# Altium PCB UPCNSL_ABS_EPS_POL_v.2.1.PcbDoc
Units mm, origin at the board's own origin, x right, y up, seen from the top; angles counter-clockwise.
Board outline 100 x 100 mm, 2 copper layers (Top Layer, Bottom Layer); 100 components, 65 nets, 323 pads, 138 vias.
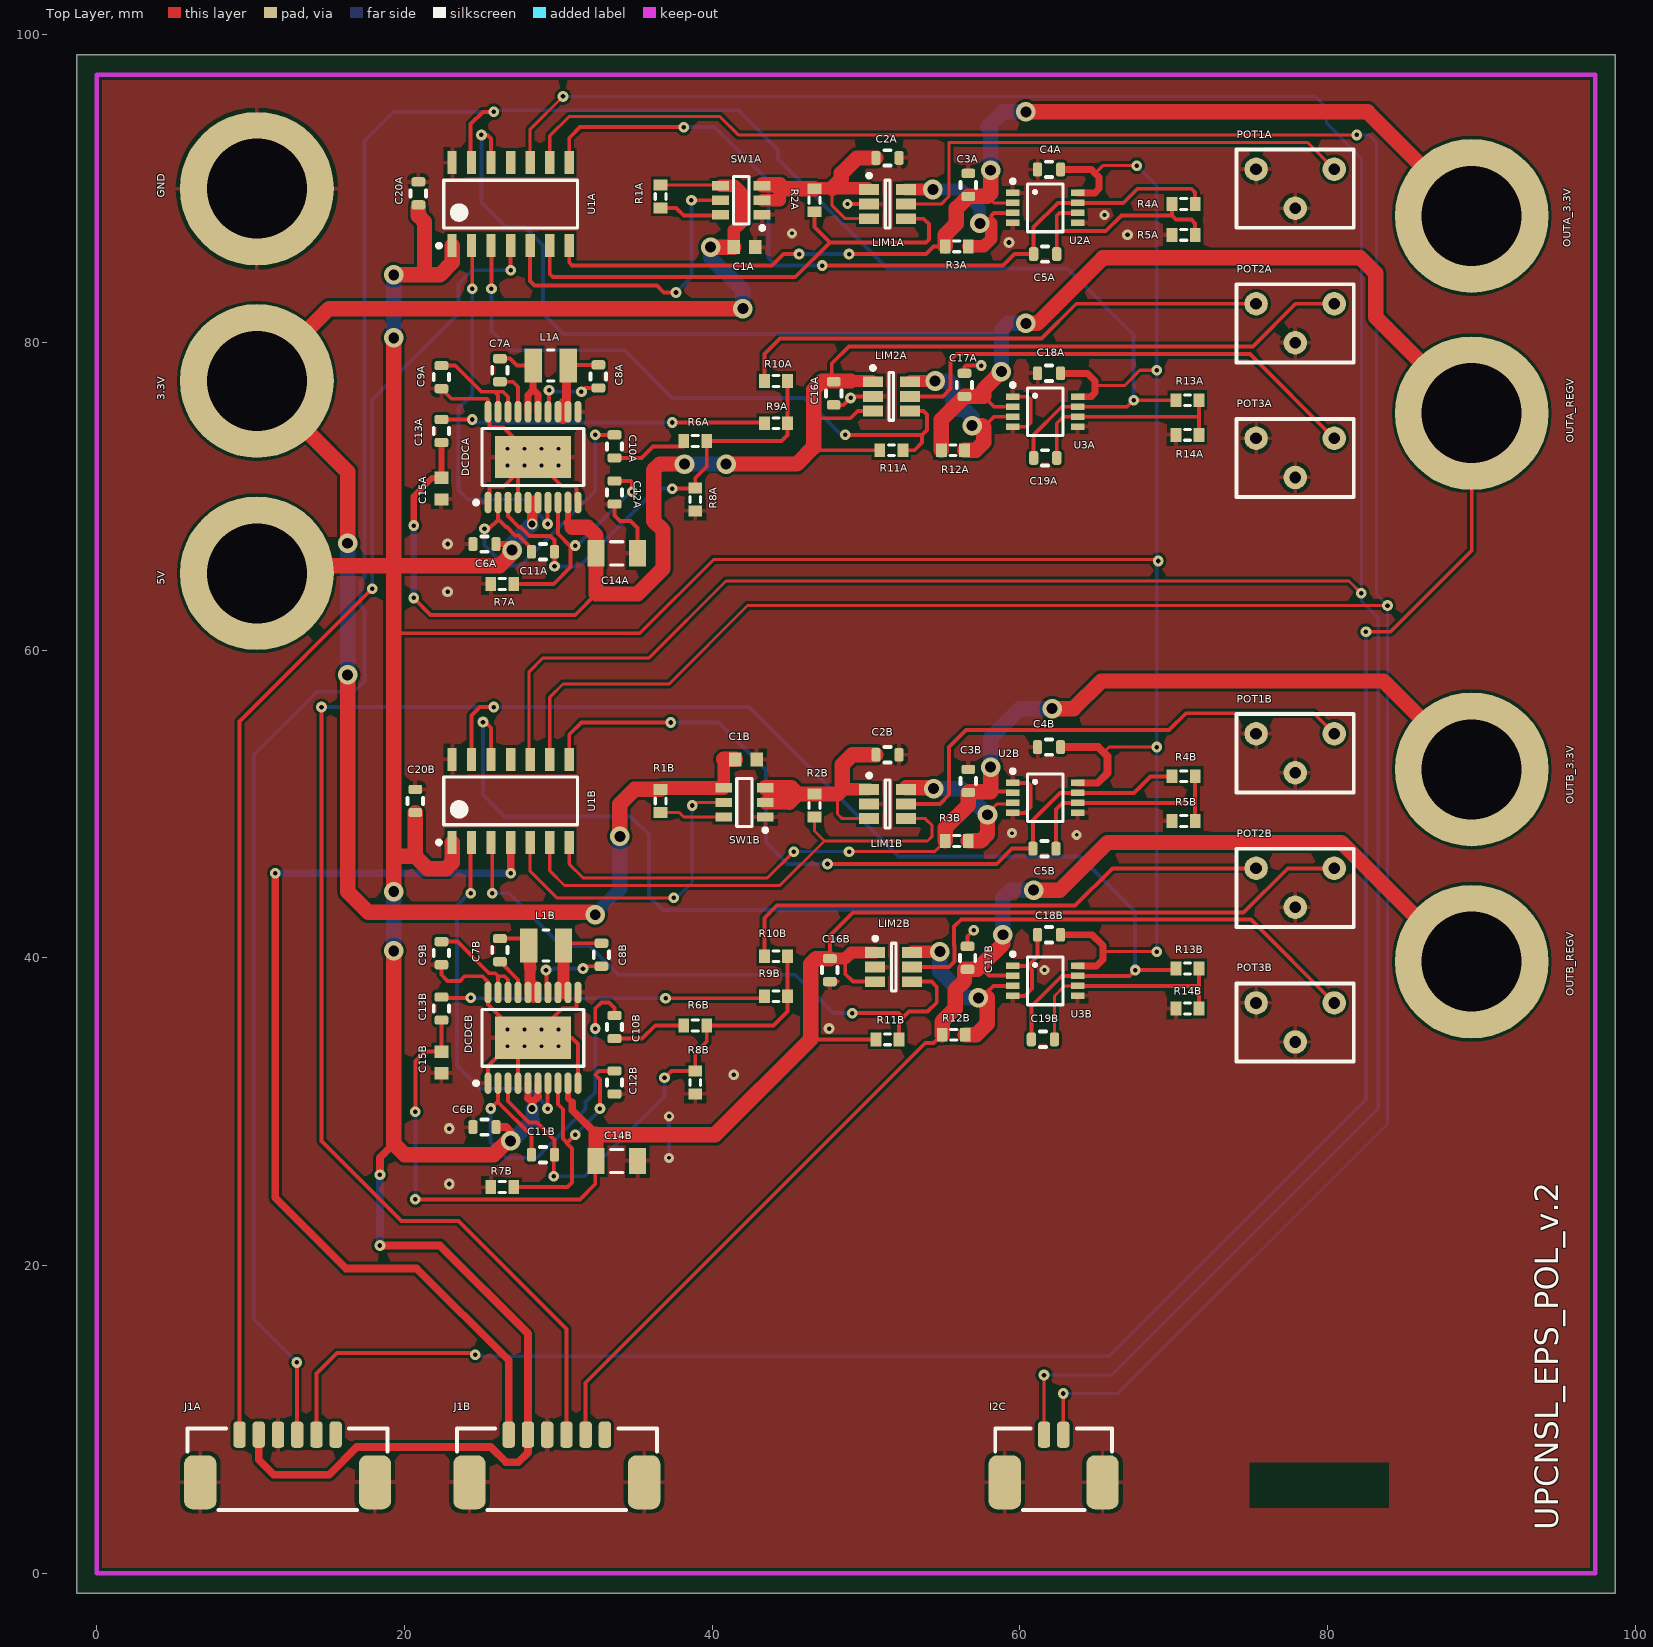
[diagram p0: Top Layer view]
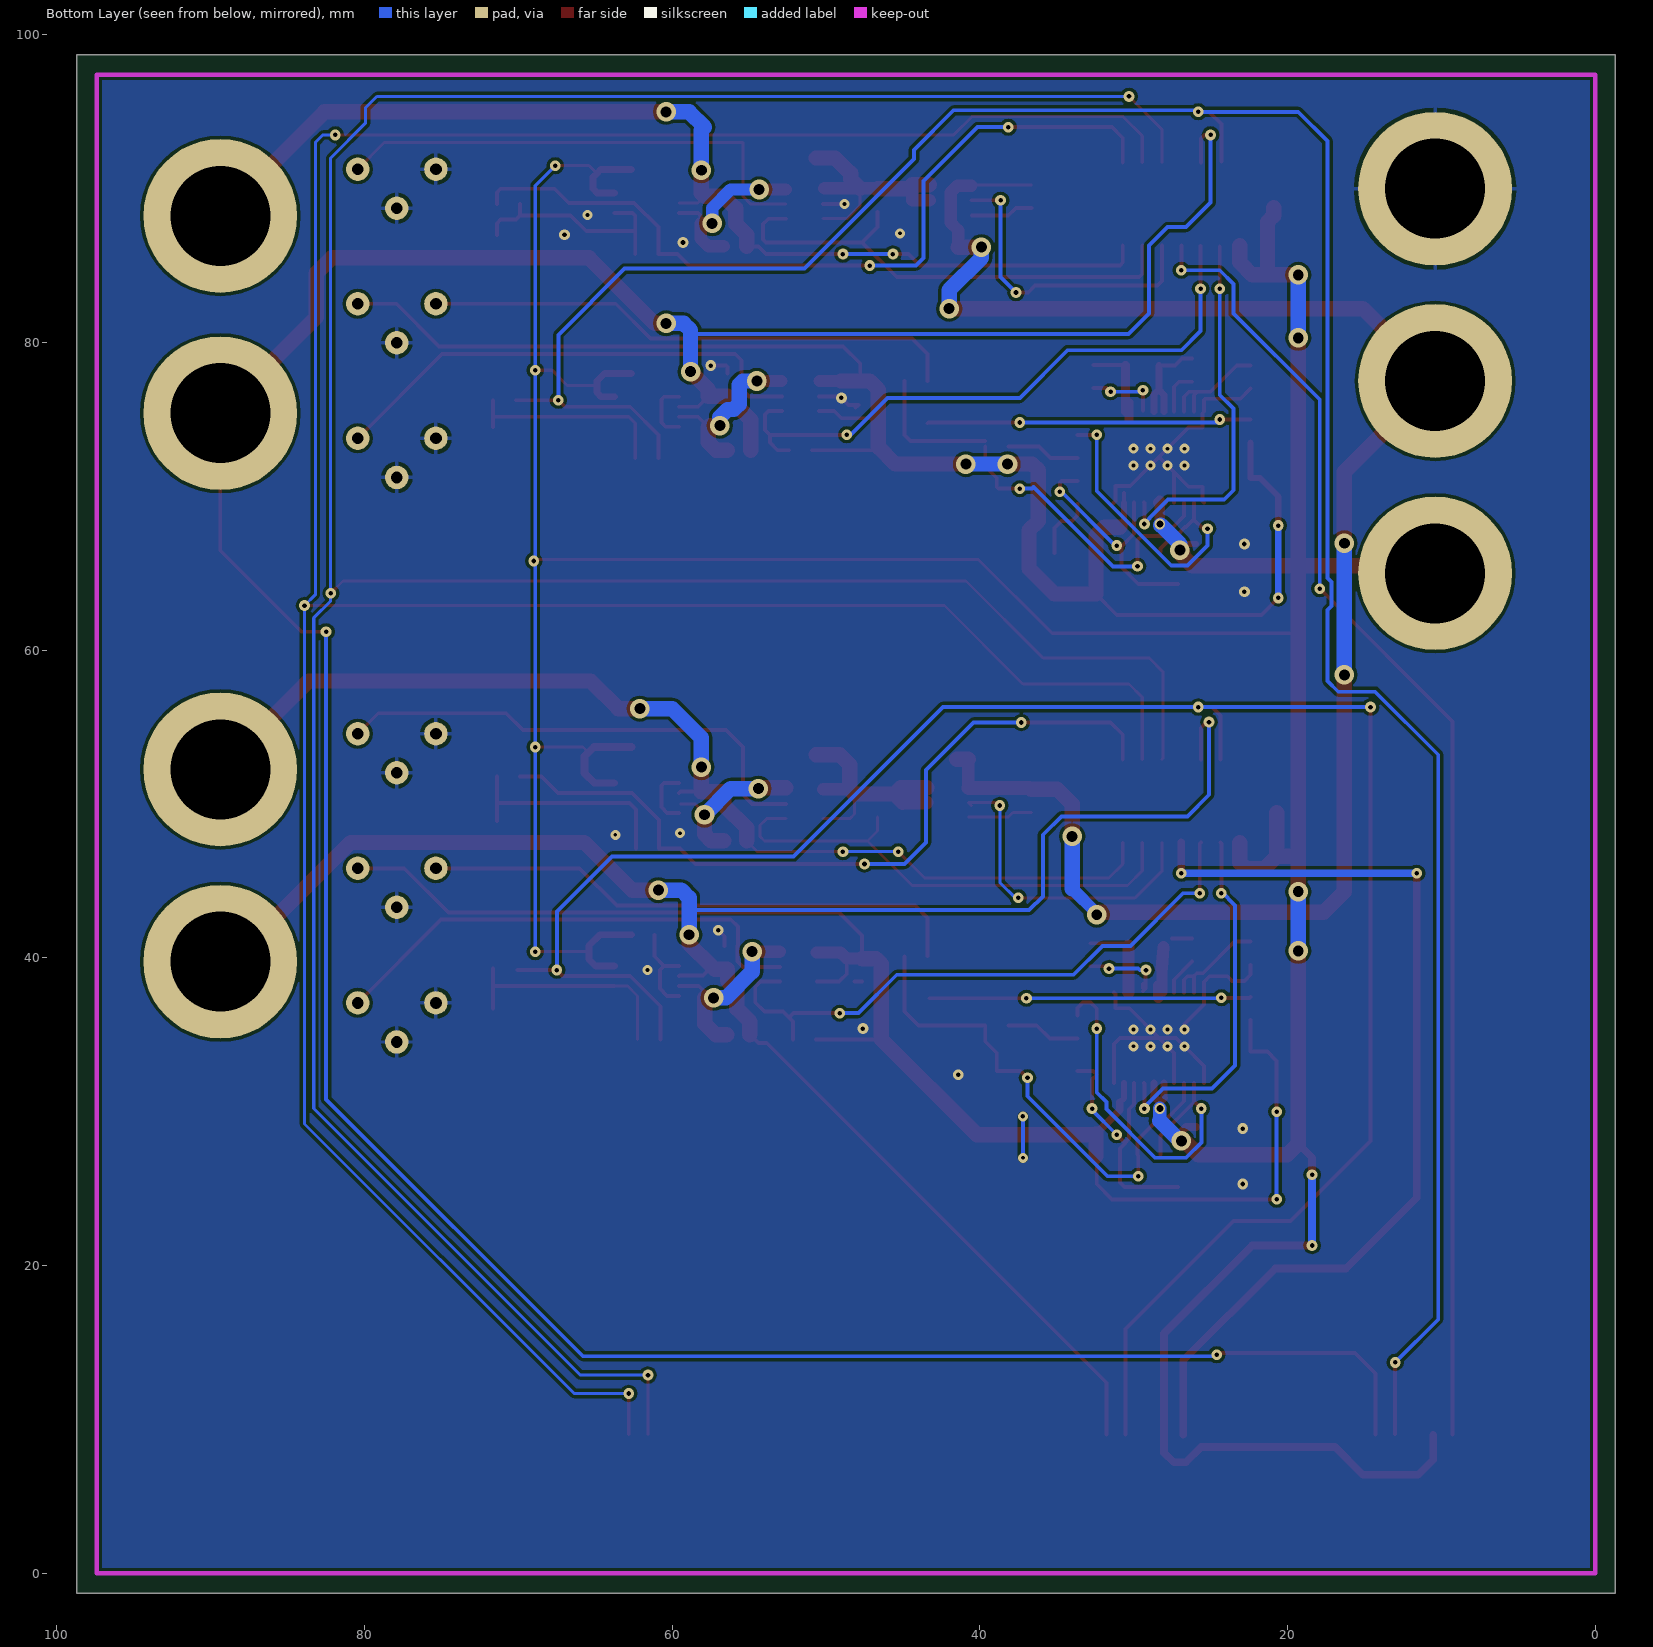
[diagram p1: Bottom Layer view, seen from below]

## Layer stack, top to bottom
Top Solder: solder mask 0.0102, Solder Resist, Dk 3.5
Top Layer: signal copper 0.0356
Dielectric 1: dielectric 0.32, FR-4, Dk 4.8
Bottom Layer: signal copper 0.0356
Bottom Solder: solder mask 0.0102, Solder Resist, Dk 3.5

## Board outline
-1.3,-1.3 98.7,-1.3 98.7,98.7 -1.3,98.7

## Design rules (kind name [scope] priority, off if disabled: settings)
Clearance [All] p1: gap=0.2
HoleSize [All] p1: absolutevalues=TRUE maxlimit=10 minlimit=0.25 maxpercent=80.000 minpercent=20.000
HoleToHoleClearance [All] p1: gap=0.2 allowstackedmicrovias=TRUE
MinimumSolderMaskSliver [All] p1: minsoldermaskwidth=0.1
PolygonConnect VIAGND [IsVia vs InNET('GND')] p1: connectstyle=Direct reliefconductorwidth=0.254 reliefentries=4 polygonreliefangle="90 Angle" airgapwidth=0.254
PolygonConnect PolygonConnect_1 [All] p2: connectstyle=Relief reliefconductorwidth=0.254 reliefentries=4 polygonreliefangle="90 Angle" airgapwidth=0.254
RoutingVias [All] p1: holewidth=0.35 width=0.6 viastyle="Through Hole" minholewidth=0.2 minwidth=0.2 maxholewidth=1 maxwidth=2
SilkToSilkClearance [All] p1: silktosilkclearance=0.2
SilkToSolderMaskClearance [IsPad] p1: minsilkscreentomaskgap=0.075 clearancetoexposedcopper=TRUE
SolderMaskExpansion [All] p1: expansion=0.102
UnpouredPolygon [All] p1: allowunpoured=FALSE
Width [All] p1: maxlimit=1 minlimit=0.2 preferedwidth=0.2
24 further rules are at their usual default settings.

## Components (designator, comment, footprint, x,y, rotation, side; value= is the part's Value field where it differs from the comment)
3.3V "Banana" Banana#1 10.4,77.5 r0 top
5V "Banana" Banana#1 10.4,65 r0 top
C1A "Cap Semi" 1608[0603] 42.1,86.2 r180 top
C1B "Cap Semi" 1608[0603] 42.2,52.9 r180 top
C2A "CAP0603" CAP0603 51.4,92 r0 top
C2B "CAP0603" CAP0603 51.4,53.2 r0 top
C3A "CAP0603" CAP0603 56.65,90.25 r90 top
C3B "CAP0603" CAP0603 56.65,51.5 r90 top
C4A "CAP0603" CAP0603 61.9,91.25 r0 top
C4B "CAP0603" CAP0603 61.9,53.7 r0 top
C5A "CAP0603" CAP0603 61.65,85.75 r0 top
C5B "CAP0603" CAP0603 61.6,47.1 r0 top
C6A "Cap Semi" CAP0603 25.2,66.9 r0 top
C6B "Cap Semi" CAP0603 25.2,29 r0 top
C7A "Cap Semi" CAP0603 26.2,78.2 r270 top
C7B "Cap Semi" CAP0603 26.2,40.5 r270 top
C8A "Cap Semi" CAP0603 32.6,77.8 r270 top
C8B "Cap Semi" CAP0603 32.8,40.2 r270 top
C9A "Cap Semi" CAP0603 22.4,77.75 r90 top
C9B "Cap Semi" CAP0603 22.4,40.3 r90 top
C10A "Cap Semi" CAP0603 33.65,73.25 r270 top
C10B "Cap Semi" CAP0603 33.65,35.5 r270 top
C11A "Cap Semi" CAP0603 29,66.4 r180 top
C11B "Cap Semi" CAP0603 29,27.2 r180 top
C12A "Cap Semi" CAP0603 33.65,70.25 r90 top
C12B "Cap Semi" CAP0603 33.65,31.9 r90 top
C13A "Cap Semi" CAP0603 22.4,74.25 r90 top
C13B "Cap Semi" CAP0603 22.4,36.7 r90 top
C14A "Cap Semi" C1206 33.8,66.3 r0 top
C14B "Cap Semi" C1206 33.8,26.8 r0 top
C15A "Cap Semi" 1608[0603] 22.4,70.5 r90 top
C15B "Cap Semi" 1608[0603] 22.4,33.2 r90 top
C16A "CAP0603" CAP0603 47.9,76.7 r270 top
C16B "CAP0603" CAP0603 47.65,39.2 r270 top
C17A "CAP0603" CAP0603 56.4,77.25 r90 top
C17B "CAP0603" CAP0603 56.6,40 r90 top
C18A "CAP0603" CAP0603 61.9,78 r0 top
C18B "CAP0603" CAP0603 61.9,41.5 r0 top
C19A "CAP0603" CAP0603 61.65,72.5 r0 top
C19B "CAP0603" CAP0603 61.5,34.7 r0 top
C20A "Cap Semi" CAP0603 20.9,89.7 r90 top
C20B "Cap Semi" CAP0603 20.7,50.2 r90 top
DCDCA "LTC3112" LTC3112TSOP 28.35,72.55 r90 top
DCDCB "LTC3112" LTC3112TSOP 28.35,34.8 r90 top
GND "Banana" Banana#2 10.4,90 r0 top
I2C "532610271" 532610271 62.2,5.9 r0 top (schematic designator I2CB)
J1A "532610671" 532610671 12.4,5.9 r0 top
J1B "532610671" 532610671 29.9,5.9 r0 top
L1A "INDUCTOR" "INDUCTOR - 1008[2520]" 29.5,78.5 r0 top
L1B "INDUCTOR" "INDUCTOR - 1008[2520]" 29.2,40.8 r0 top
LIM1A "MIC2039AYM6" SOT23-6_M 51.4,89 r0 top
LIM1B "MIC2039AYM6" SOT23-6_M 51.4,50 r0 top
LIM2A "MIC2039AYM6" SOT23-6_M 51.65,76.5 r0 top
LIM2B "MIC2039AYM6" SOT23-6_M 51.8,39.4 r0 top
OUTA_3.3V "Banana" Banana#1 89.378,88.235 r0 top
OUTA_REGV "Banana" Banana#1 89.378,75.408 r0 top
OUTB_3.3V "Banana" Banana#1 89.378,52.25 r90 top
OUTB_REGV "Banana" Banana#1 89.378,39.75 r90 top
POT1A "Rlim=289/ilim" "Potenciometre no recte" 77.9,90 r180 top
POT1B "Rlim=289/ilim" "Potenciometre no recte" 77.9,53.3 r180 top
POT2A "674k" "Potenciometre no recte" 77.9,81.25 r180 top
POT2B "674k" "Potenciometre no recte" 77.9,44.55 r180 top
POT3A "Rlim=289/ilim" "Potenciometre no recte" 77.9,72.5 r180 top
POT3B "Rlim=289/ilim" "Potenciometre no recte" 77.9,35.8 r180 top
R1A "Res3" J1-0603 36.65,89.5 r270 top
R1B "Res3" J1-0603 36.65,50.2 r270 top
R2A "Res3" J1-0603 46.65,89.25 r90 top
R2B "Res3" J1-0603 46.65,49.9 r90 top
R3A "Res3" J1-0603 55.9,86.25 r0 top
R3B "Res3" J1-0603 55.9,47.6 r0 top
R4A "Res3" J1-0603 70.65,89 r180 top
R4B "Res3" J1-0603 70.65,51.8 r0 top
R5A "Res3" J1-0603 70.65,87 r180 top
R5B "Res3" J1-0603 70.65,48.9 r180 top
R6A "Res3" J1-0603 38.9,73.6 r180 top
R6B "Res3" J1-0603 38.9,35.6 r180 top
R7A "Res3" J1-0603 26.35,64.3 r0 top
R7B "Res3" J1-0603 26.35,25.1 r0 top
R8A "Res3" J1-0603 38.9,69.8 r90 top
R8B "Res3" J1-0603 38.9,31.9 r90 top
R9A "Res3" J1-0603 44.15,74.75 r180 top
R9B "Res3" J1-0603 44.15,37.5 r180 top
R10A "Res3" J1-0603 44.15,77.5 r180 top
R10B "Res3" J1-0603 44.15,40.1 r180 top
R11A "Res3" J1-0603 51.65,73 r180 top
R11B "Res3" J1-0603 51.4,34.7 r180 top
R12A "Res3" J1-0603 55.65,73 r0 top
R12B "Res3" J1-0603 55.7,35 r0 top
R13A "Res3" J1-0603 70.9,76.25 r0 top
R13B "Res3" J1-0603 70.9,39.3 r0 top
R14A "Res3" J1-0603 70.9,74 r180 top
R14B "Res3" J1-0603 70.9,36.7 r180 top
SW1A "TPS27082L" TPS27082L 41.9,89.25 r180 top
SW1B "TPS27082L" TPS27082L 42.1,50.1 r180 top
U1A "PIC16F1823" PIC16F1823 26.9,89 r90 top
U1B "PIC16F1823" PIC16F1823 26.9,50.2 r90 top
U2A "LTC2053" "LTC2053 IPC" 61.65,88.75 r0 top
U2B "LTC2053" "LTC2053 IPC" 61.65,50.4 r0 top
U3A "LTC2053" "LTC2053 IPC" 61.65,75.5 r0 top
U3B "LTC2053" "LTC2053 IPC" 61.65,38.5 r0 top

## Footprints (in the part's own frame and the unit in brackets; to place one, negate y for a bottom-side part, rotate by r counter-clockwise, add the part's x,y. Pads: shape width x height; smd on the part's side, far side on the other; paste and mask are expansions set on the pad)
1608[0603] [mm] "Chip Capacitor, Body 1.6x0.8mm, IPC High Density"
  rect 0.8x0.9 smd: 1(-0.7,0) 2(0.7,0)
  body extent -0.87,-0.48 0.87,0.48, height 1.3
532610271 [mm] "MACHO, ACODADO, SMT, 2 VÍAS"
  rrect50% 2.1x3.5 smd: 0(-3.175,0) 0(3.175,0)
  rrect50% 0.8x1.7 smd: 1(-0.625,3.1) 2(0.625,3.1)
  silkscreen extent -3.8,-1.8 3.8,3.5, body extent -3.83,-1.8 3.83,3.4, height 3.35
532610671 [mm] "MACHO, ACODADO, SMT, 6 VÍAS"
  rrect50% 2.1x3.5 smd: 0(-5.675,0) 0(5.675,0)
  rrect50% 0.8x1.7 smd: 1(-3.125,3.1) 2(-1.875,3.1) 3(-0.625,3.1) 4(0.625,3.1) 5(1.875,3.1) 6(3.125,3.1)
  silkscreen extent -6.5,-1.8 6.5,3.5, body extent -6.32,-1.8 6.32,3.4, height 3.4
Banana#1 [mm]
  round 10 hole 6.5: 1(0,0)
Banana#2 [mm]
  round 10 hole 6.5 unplated: 1(0,0)
C1206 [mm] "Chip Capacitor, Body 3.2x1.6mm, IPC High Density"
  rect 1.1x1.7 smd: 1(-1.35,0) 2(1.35,0)
  silkscreen extent -0.4,-0.75 0.4,0.75, body extent -1.7,-0.9 1.7,0.9, height 1.3
CAP0603 [mm] "Capacitor Chip Inductor, Body 0.6x0.3mm, IPC High Density"
  rrect50% 0.6x0.9 smd: 1(-0.75,0) 2(0.75,0)
  silkscreen extent -0.2,-0.5 0.2,0.5, body extent -0.76,-0.38 0.76,0.38, height 0.76
"INDUCTOR - 1008[2520]" [mm] "Chip Inductor, 2-Leads, Body 2,50x2,00mm, IPC Medium Density"
  rect 1.13x2.22 smd: 1(-1.135,0) 2(1.135,0)
  silkscreen extent -0.2,-1.01 0.2,1.01, body extent -1.35,-1.1 1.35,1.1, height 1.2
J1-0603 [mm] "Chip Resistor, Body 1.6x0.8mm, IPC High Density"
  rect 0.7x0.9 smd: 1(-0.75,0) 2(0.75,0)
  silkscreen extent -0.2,-0.35 0.2,0.35, body extent -0.85,-0.48 0.85,0.48, height 0.9
"LTC2053 IPC" [mm] "TSOP, 8-Leads, Body 3,00x3,00mm, Pitch 0,65mm, IPC Medium Density"
  rect 0.889x0.42 smd: 1(-2.105,0.975) 2(-2.105,0.325) 3(-2.105,-0.325) 4(-2.105,-0.975) 5(2.105,-0.975) 6(2.105,-0.325) 7(2.105,0.325) 8(2.105,0.975)
  silkscreen extent -2.23,-1.55 1.15,1.86, body extent -1.55,-1.55 1.55,1.55, height 1.1
LTC3112TSOP [mm]
  oval 1.4x0.45 smd: 1(-2.95,2.925) 2(-2.95,2.275) 3(-2.95,1.625) 4(-2.95,0.975) 5(-2.95,0.325) 6(-2.95,-0.325) 7(-2.95,-0.975) 8(-2.95,-1.625) 9(-2.95,-2.275) 10(-2.95,-2.925) 11(2.95,-2.925) 12(2.95,-2.275) 13(2.95,-1.625) 14(2.95,-0.975) 15(2.95,-0.325) 16(2.95,0.325) 17(2.95,0.975) 18(2.95,1.625) 19(2.95,2.275) 20(2.95,2.925)
  rect 2.74x4.95 smd: 21(0,0)
  silkscreen extent -3.07,-3.3 1.85,3.82, body extent -2.25,-3.3 2.25,3.3, height 1.2
PIC16F1823 [mm] "SOIC, 14-Leads, Body 8,65x3,90mm, Pitch 1,27mm, IPC Medium Density"
  rect 1.5x0.6 smd: 1(-2.7,3.81) 2(-2.7,2.54) 3(-2.7,1.27) 4(-2.7,0) 5(-2.7,-1.27) 6(-2.7,-2.54) 7(-2.7,-3.81) 8(2.7,-3.81) 9(2.7,-2.54) 10(2.7,-1.27) 11(2.7,0) 12(2.7,1.27) 13(2.7,2.54) 14(2.7,3.81)
  silkscreen extent -2.82,-4.35 1.55,4.78, body extent -1.95,-4.35 1.95,4.35, height 1.75
"Potenciometre no recte" [mil]
  round 60 hole 30: 1(-100,-50) 2(0,50) 3(100,-50)
  silkscreen extent -150,-100 150,100
SOT23-6_M [mm] "SOT23, 6-Leads, Body 2.9x1.6mm, Pitch 0.95mm, Lead Span 2.7mm, IPC Low Density"
  rect 1.3x0.7 smd: 1(-1.2,0.95) 2(-1.2,0) 3(-1.2,-0.95) 4(1.2,-0.95) 5(1.2,0) 6(1.2,0.95)
  silkscreen extent -1.32,-1.55 0.15,1.97, body extent -0.9,-1.55 0.9,1.55, height 1.45
TPS27082L [mm]
  rect 1.1x0.6 smd: 1(-1.35,0.95) 2(-1.35,0) 3(-1.35,-0.95) 4(1.35,-0.95) 5(1.35,0) 6(1.35,0.95)
  silkscreen extent -1.48,-1.55 0.5,1.92, body extent -0.87,-1.52 0.87,1.53, height 1.1

## Part data
C1A C1B C6A C6B C7A C7B C8A C8B C9A C9B C10A C10B C11A C11B C12A C12B C13A C13B C14A C14B C15A C15B C20A C20B: "Capacitor (Semiconductor SIM Model)"
C2A C2B C3A C3B C4A C4B C5A C5B C16A C16B C17A C17B C18A C18B C19A C19B: "Capacitor"
DCDCA DCDCB: library part LTC3112Modi
I2C: library part MOLEX_532610271, "1.25mm Pitch PicoBlade™ Header, Surface Mount, Right Angle, Lead-Free, 2 Circuits"
J1A J1B: library part MOLEX_532610671, "1.25mm Pitch PicoBlade™ Header, Surface Mount, Right Angle, Lead-Free, 6 Circuits"
LIM1A LIM1B LIM2A LIM2B: library part MIC2039
POT1A POT1B POT2A POT2B POT3A POT3B: library part Potenciometre
R1A R1B R2A R2B R3A R3B R4A R4B R5A R5B R6A R6B R7A R7B R8A R8B R9A R9B R10A R10B R11A R11B R12A R12B R13A R13B R14A R14B: "Resistor"

## Via types
v1: diameter 0.7, hole 0.3, Top Layer to Bottom Layer, 82 vias
v2: diameter 1.27, hole 0.711, Top Layer to Bottom Layer, 30 vias
v3: diameter 0.65, hole 0.25, Top Layer to Bottom Layer, 23 vias
v4: diameter 0.7, hole 0.45, Top Layer to Bottom Layer, 2 vias
v5: diameter 0.65, hole 0.3, Top Layer to Bottom Layer, 1 vias

## Nets (pads, with @x,y where several pads share a name; then routed paths per layer and width w, separated by ;. In a path a pad name is that pad's centre, name@x,y a point inside that pad or via, vN(x,y) a via of type N, cw(c..) or ccw(c..) an arc to the next point about the centre after c; other vN are vias at no path point)
CURRENT3.3VA: C5A.1 R4A.1 U1A.8 U2A.7 | length 53.2
  Top Layer w0.254: U1A.8 30.71,93.31 31.4,94 v1(38.15,94) ; v1(47.15,85) 58.9,85 59.65,85.75 C5A.1 60.9,87.5 62.475,89.075 U2A.7 66.725,89.075 67.65,90 71.15,90 71.4,89.75 R4A.1
  Bottom Layer w0.254: v1(38.15,94) 40.15,94 43.65,90.5 43.65,85.5 44.15,85 v1(47.15,85)
CURRENT3.3VB: C5B.1 R4B.1 U1B.8 U2B.7 | length 51.1
  Top Layer w0.254: U1B.8 30.71,54.51 31.5,55.3 v1(37.3,55.3) ; v1(47.5,46.1) 58.5,46.1 59.5,47.1 C5B.1 60.85,48.95 62.625,50.725 U2B.7 67.425,50.725 68.5,51.8 R4B.1
  Bottom Layer w0.254: v1(37.3,55.3) 40.4,55.3 43.5,52.2 43.5,47.5 44.9,46.1 v1(47.5,46.1)
CURRENTFAULT3.3VA: LIM1A.4 R2A.1 U1A.6 | length 32.7
  Top Layer w0.254: U1A.6 29.44,84.46 29.65,84.25 36.15,84.25 45.4,84.25 47.65,86.5 ; R2A.1 46.65,87.5 47.65,86.5 ; LIM1A.4 53.75,88.05 54.1,87.7 54.1,86.7 53.9,86.5 47.65,86.5
CURRENTFAULT3.3VB: LIM1B.4 R2B.1 U1B.6 | length 32.8
  Top Layer w0.2: U1B.6 29.44,45.66 30.4,44.7 44.4,44.7 47.3,47.6 ; R2B.1 46.65,48.25 47.3,47.6 ; LIM1B.4 53.85,49.05 54.3,48.6 54.3,47.9 54,47.6 47.3,47.6
CURRENTFAULTREGVA: LIM2A.4 R11A.1 U1A.3 | length 41
  Top Layer w0.254: v1(25.65,83.5) U1A.3@25.65,86.28 ; v1(48.65,74) 53.65,74 ; R11A.1 53.15,73 53.65,73.5 53.65,74 ; LIM2A.4 53.75,75.55 53.975,75.325 53.975,74.325 53.65,74
  Bottom Layer w0.254: v1(25.65,83.5) 25.65,80.75 26.9,79.5 34.3,79.5 37.4,76.4 46,76.4 48.4,74 v1(48.65,74)
CURRENTFAULTREGVB: LIM2B.4 R11B.1 U1B.3 | length 40.3
  Top Layer w0.254: U1B.3 25.7,47.43 v1(25.7,44.2) ; v1(49.1,36.4) 52.1,36.4 52.325,36.175 52.475,36.175 ; R11B.1 52.15,35.85 52.475,36.175 ; LIM2B.4 54.25,38.45 54.6,38.1 54.6,37.1 54,36.5 52.8,36.5 52.475,36.175
  Bottom Layer w0.254: v1(25.7,44.2) 26.787,44.2 30.211,40.776 32.024,40.776 33.9,38.9 45.4,38.9 47.9,36.4 v1(49.1,36.4)
CURRENTREGVA: C19A.1 J1A.4 R13A.1 U1A.13 U3A.7 | length 167.1
  Top Layer w0.254: J1A.4@13,9.025 v1(13,13.7) ; U1A.13@24.3,91.76 24.3,94.2 25.1,95 v1(25.8,95) ; C19A.1 60.9,74 62.725,75.825 U3A.7 66.975,75.825 v1(67.4,76.25) R13A.1
  Bottom Layer w0.254: v1(13,13.7) 10.2,16.5 10.2,53.2 14.3,57.3 16.7,57.3 17.4,58 17.4,62.6 17.127,62.873 17.127,64.427 17.4,64.7 17.4,93.1 19.3,95 v1(25.8,95) ; v1@25.9,95.1 41.7,95.1 44.275,92.525 44.275,91.925 51.4,84.8 63.1,84.8 67.4,80.5 v1(67.4,76.25)
CURRENTREGVB: C19B.1 J1B.4 R13B.1 U1B.13 U3B.7 | length 135.2
  Top Layer w0.254: v1(14.6,56.3) 14.6,28.1 19.8,22.9 23.5,22.9 30.525,15.875 J1B.4 ; U1B.13 24.36,55.76 24.9,56.3 v1(25.8,56.3) ; C19B.1 60.75,36.85 62.725,38.825 U3B.7 67.125,38.825 v1(67.5,39.2) R13B.1@70.05,39.2
  Bottom Layer w0.254: v1(14.6,56.3) v1(25.8,56.3) 42.4,56.3 52.1,46.6 63.9,46.6 67.5,43 v1(67.5,39.2)
ENABLE3.3VA: SW1A.5 U1A.5 | length 20.4
  Top Layer w0.254: U1A.5 28.15,86.28 28.15,84 28.45,83.7 30.091,83.7 36.4,83.7 36.85,83.25 v1(37.65,83.25) ; v1(38.65,89.25) SW1A.5
  Bottom Layer w0.254: v1(37.65,83.25) 38.65,84.25 v1(38.65,89.25)
ENABLE3.3VB: SW1B.5 U1B.5 | length 20.7
  Top Layer w0.2: U1B.5 28.17,45.63 29.9,43.9 v1(37.5,43.9) ; v1@38.9,50.1 SW1B.5 SW1B.5@40.55,49.9
  Bottom Layer w0.2: v1(37.5,43.9) 37.7,43.9 38.7,44.9 v1(38.7,49.9)
ENABLEREGVA: DCDCA.7 U1A.2 | length 24.4
  Top Layer w0.254: v1(24.4,83.5) U1A.2@24.4,86.26 ; v1(29.3,68.2) 29.3,69.575 DCDCA.7
  Bottom Layer w0.254: v1(24.4,83.5) 24.4,76.6 23.5,75.7 23.5,70.4 24.111,69.789 27.768,69.789 28.977,68.58 ; 28.977,68.548 29.3,68.225 v1(29.3,68.2)
ENABLEREGVB: DCDCB.7 U1B.2 | length 23.9
  Top Layer w0.254: v1(24.3,44.2) 24.3,47.44 U1B.2 ; v1(29.3,30.2) 29.3,31.825 DCDCB.7
  Bottom Layer w0.254: v1(24.3,44.2) 24.3,44.3 23.4,43.4 23.4,33 24.9,31.5 28.1,31.5 29.3,30.3 v1(29.3,30.2)
GND: C1A.1 C1B.1 C2A.2 C2B.2 C3A.2 C3B.2 C4A.1 C4B.1 C6A.1 C6B.1 C9A.1 C9B.1 C12A.1 C12B.1 C14A.2 C14B.2 C15A.1 C15B.1 C16A.2 C16B.2 C17A.2 C17B.2 C18A.1 C18B.1 C20A.2 C20B.2 DCDCA.1 DCDCA.4 DCDCA.10 DCDCA.11 DCDCA.20 DCDCA.21 DCDCB.1 DCDCB.4 DCDCB.10 DCDCB.11 DCDCB.20 DCDCB.21 GND.1 I2C.0 J1A.0 J1A.3 J1B.0 J1B.3 LIM1A.2 LIM1B.2 LIM2A.2 LIM2B.2 POT1A.2 POT1A.3 POT1B.2 POT1B.3 POT2A.2 POT2B.2 POT3A.2 POT3A.3 POT3B.2 POT3B.3 R5A.2 R5B.2 R7A.1 R7B.1 R8A.1 R8B.1 R14A.2 R14B.2 SW1A.1 SW1B.1 U1A.14 U1B.14 U2A.1 U2A.4 U2A.5 U2B.1 U2B.4 U2B.5 U3A.1 U3A.4 U3A.5 U3B.1 U3B.4 U3B.5 | length 74.9
  Top Layer w0.254: C9B.1 22.4,38.9 22.8,38.5 23.6,38.5 23.9,38.8 25.058,38.8 25.425,38.433 DCDCB.20 25.425,36.975 DCDCB.21@26.7,35.7 ; C9A.1 23.054,76.346 25.354,76.346 25.425,76.275 DCDCA.20 25.523,75.402 25.523,74.473 26.427,74.473 v3(27.8,73.1) DCDCA.21 ; DCDCB.1 25.425,32.975 v3(26.7,34.25) 27.25,34.8 DCDCB.21 ; DCDCA.1 25.523,69.698 25.523,70.627 26.427,70.627 DCDCA.21@27.375,71.575 ; DCDCB.4 27.375,33.825 DCDCB.21 ; DCDCA.4 DCDCA.21@27.375,71.575 ; DCDCB.10 31.275,34.404 30.879,34.8 DCDCB.21 ; DCDCB.11 31.177,37.652 31.177,36.723 30.273,36.723 DCDCB.21 ; DCDCA.10@31.3,69.575 DCDCA.10 31.177,69.698 31.177,70.671 31.169,70.679 30.221,70.679 v3(28.9,72) DCDCA.21 ; C12A.1 33.65,68.75 34,68.4 34.7,68.4 35.15,67.95 C14A.2 ; C16B.2 48.15,38.45 ; C16A.2@48.077,75.773 C16A.2 48.55,75.95 v1(49,76.4) 49.1,76.5 LIM2A.2 ; v3(48.8,89) LIM1A.2 ; C17A.2 56.4,78.4 56.5,78.5 v1(57.5,78.5) ; C17B.2 56.6,41.4 v1(57,41.8) ; U3B.4 60.325,37.525 60.8,38 60.8,39.2 60.525,39.475 ; U3B.1 60.525,39.475 ; U2B.4 60.325,49.425 60.7,49.8 60.7,51.2 60.525,51.375 U2B.1 ; U3A.4 60.425,74.525 60.7,74.8 60.7,76.3 60.525,76.475 U3A.1 ; C18B.1 61.15,40.1 60.525,39.475 ; DCDCA.21@27.375,71.575 DCDCA.21
  Bottom Layer w0.254: v3(37.2,27) v5(37.2,29.7)
  other v1: 22.9,25.3 22.9,28.9 41.4,32.4 47.6,35.4 22.8,63.8 22.8,66.9 59.3,86.5 67,87
  other v3: 27.8,34.25 28.9,34.25 30,34.25 26.7,35.35 27.8,35.35 28.9,35.35 30,35.35 61.6,39.2 63.7,48 59.5,48.1 26.7,72 27.8,72 30,72 26.7,73.1 28.9,73.1 30,73.1 45.2,87.1 65.5,88.3
IN_3.3V: 3.3V.1 C1A.2 C1B.2 R1A.1 R1B.1 SW1A.4 SW1B.4 | length 119
  Top Layer w0.2: R1A.1 SW1A.4@40.55,90.25
  Top Layer w0.8: SW1A.4 41.45,90.2 41.9,89.75 41.9,87.8 41.4,87.3 C1A.2 ; SW1B.4 40.75,52.9
  Top Layer w0.9: R1B.1@36.75,51.05 SW1B.4
  Top Layer w1: v2(16.3,58.4) 16.3,44.3 17.635,42.965 32.235,42.965 v2(32.4,42.8) ; v2(16.3,66.95) 16.3,71.6 3.3V.1 15.1,82.2 v2(42,82.2) ; v2(34,47.9) 34,50 34.95,50.95 R1B.1 ; v2(39.9,86.2) C1A.2 ; 40.75,52.9 C1B.2
  Bottom Layer w0.8: v2(32.4,42.8) 32.4,42.9 34,44.5
  Bottom Layer w1: v2(16.3,58.4) v2(16.3,66.95) ; 34,44.5 v2(34,47.9) ; v2(39.9,86.2) 39.9,85.5 42,83.4 v2(42,82.2)
IN_5V: 5V.1 C4A.2 C4B.2 C6A.2 C6B.2 C18A.2 C18B.2 C20A.1 C20B.1 DCDCA.5 DCDCA.6 DCDCB.5 DCDCB.6 J1A.2 J1B.2 U1A.1 U1B.1 U2A.8 U2B.8 U3A.8 U3B.8 | length 300.1
  Top Layer w0.2: 5V.1 5V.1@11.15,64.25 ; 19.3,61.1 35.3,61.1 40.1,65.9 68.9,65.9 v1(69,65.8) ; 64.9,77.2 66.8,77.2 67.8,78.2 v1(68.9,78.2) ; 64.9,91 65.4,91.5 v1(67.6,91.5) ; 65.45,40.4 v1(68.9,40.4) ; 65.5,53.4 65.8,53.7 v1(68.9,53.7)
  Top Layer w0.4: C6A.2 v2@26.9,66.9 ; DCDCA.5@28,69.575 DCDCA.5
  Top Layer w0.45: 28.025,30.875 DCDCB.5 ; 28.675,30.975 DCDCB.6 ; C18B.2 64.7,41.5 65.4,40.8 65.4,39.9 64.975,39.475 U3B.8 ; C18A.2 64.4,78 64.9,77.5 64.9,77.2 64.9,76.75 64.625,76.475 U3A.8 ; C4A.2 64.65,91.25 64.9,91 65.15,90.75 65.15,90 64.875,89.725 U2A.8 ; U2B.8 65.075,51.375
  Top Layer w0.5: J1A.2 10.525,7.375 11.5,6.4 15.1,6.4 16.9,8.2 25.6,8.2 26.6,7.2 27.4,7.2 28.025,7.825 J1B.2 28.025,15.575 22.3,21.3 v1(18.4,21.3) ; v1(18.4,25.9) 18.4,27 19.3,27.9 ; C6B.2 26.6,29 26.9,28.7 v2(26.9,28.1) v2@26.7,28.1 ; 28.025,30.875 28.3,30.6 ; v4(28.3,30.2) 28.3,30.6 ; 28.675,30.975 28.3,30.6 ; C4B.2 65.1,53.7 65.7,53.1 65.7,52 65.075,51.375
  Top Layer w0.7: v4(28.3,68.2) 28.3,69.5 28.4,69.6 28.3,69.7
  Top Layer w1: 5V.1@10.9,65.5 19.3,65.5 ; v2(19.3,40.45) 19.3,27.9 20,27.2 25.8,27.2 v2@26.7,28.1 ; v2(19.3,44.3) 19.3,65.5 ; v2(19.3,80.3) 19.3,65.5 ; v2(19.3,84.4) 21.3,84.4 ; 19.4,46.6 20.7,46.6 ; C20B.1 20.7,46.6 ; C20A.1@20.9,88.75 20.9,88.25 21.3,87.85 21.3,84.4 ; U1B.1 23.09,46.19 22.7,45.8 21.5,45.8 20.7,46.6 ; U1A.1@23.1,86.29 23.1,85.2 22.3,84.4 21.3,84.4 ; v2(27,66.5) 26.8,66.3 26.9,66.2 26.2,65.5 19.3,65.5
  Bottom Layer w0.2: v1@67.7,91.7 67.7,91.4 68.9,90.2 v1(68.9,78.2) v1(68.9,53.7) v1(68.9,40.4)
  Bottom Layer w0.5: v1(18.4,21.3) v1(18.4,25.9)
  Bottom Layer w0.9: 28.3,29.4 v4(28.3,30.2)
  Bottom Layer w1: v2(19.3,40.45) v2(19.3,44.3) ; v2(19.3,80.3) v2(19.3,84.4) ; v2@27,28.1 28.3,29.4 ; v2(27,66.5) 27,66.9 v4@28.228,68.128
NetC2A_1: C2A.1 LIM1A.1 LIM1A.3 R2A.2 SW1A.2 SW1A.3 | length 16.8
  Top Layer w0.2: 47.8,90.027 47.8,88.9 48.65,88.05 LIM1A.3
  Top Layer w0.254: SW1A.3 SW1A.3@43.3,90.25 ; 44.4,90 44.4,90.25 ; R2A.2 R2A.2@46.677,90.027
  Top Layer w0.8: SW1A.2 44.4,89.25 44.4,90 ; R2A.2@46.677,90.027 LIM1A.1@50.123,90.027
  Top Layer w1: SW1A.3@43.3,90.25 44.4,90.25 ; 44.4,90 R2A.2 ; 47.8,90.027 48.4,90.627 48.4,91 49.4,92 C2A.1
NetC2B_1: C2B.1 LIM1B.1 LIM1B.3 R2B.2 SW1B.2 SW1B.3 | length 16.9
  Top Layer w0.2: 48.15,50.65 48.15,49.35 48.45,49.05 LIM1B.3
  Top Layer w0.8: 48.45,50.95 LIM1B.1
  Top Layer w0.9: SW1B.2 45,50.1
  Top Layer w1: SW1B.3 45.15,51.05 45.55,50.65 ; 45,50.1 45.55,50.65 ; C2B.1 49.1,53.2 48.45,52.55 48.45,50.95 48.15,50.65 R2B.2 45.55,50.65
NetC5A_2: C5A.2 R4A.2 R5A.1 U2A.6 | length 15.1
  Top Layer w0.254: C5A.2 62.4,87.25 ; U2A.6 62.575,88.425 62.4,88.25 62.4,87.25 ; R4A.2 69.9,88.25 ; R5A.1 71.4,87.75 71.15,88 70.15,88 69.9,88.25 ; 62.4,87.25 62.412,87.238 65.588,87.238 66.6,88.25 69.9,88.25
NetC5B_2: C5B.2 R4B.2 R5B.1 U2B.6 | length 14.7
  Top Layer w0.254: C5B.2 62.35,49.65 62.775,50.075 U2B.6 71.375,50.075 ; R5B.1 R4B.2
NetC7A_1: C7A.1 DCDCA.15 DCDCA.16 L1A.1 | length 7.1
  Top Layer w0.254: C7A.1 26.85,78.95 27.3,78.5 L1A.1
  Top Layer w0.45: DCDCA.16 28.025,76.595 28.365,76.935 ; L1A.1 28.365,76.935 ; DCDCA.15 28.675,76.625 28.365,76.935
NetC7A_2: C7A.2 DCDCA.17 | length 2.9
  Top Layer w0.254: C7A.2 27.05,77.45 27.375,77.125 DCDCA.17
NetC7B_1: C7B.1 DCDCB.15 DCDCB.16 L1B.1 | length 5
  Top Layer w0.254: C7B.1 L1B.1@27.515,41.25
  Top Layer w0.7: DCDCB.16@28.165,37.79 28.165,39.3 ; 28.4,37.4 28.4,38.2
  Top Layer w0.8: L1B.1@28.065,40.7 28.165,39.3
NetC7B_2: C7B.2 DCDCB.17 | length 2.5
  Top Layer w0.254: C7B.2 27.375,38.575 DCDCB.17
NetC8A_1: C8A.1 DCDCA.12 DCDCA.13 L1A.2 | length 6.1
  Top Layer w0.254: L1A.2@30.535,78.5 L1A.2@30.625,78.49 ; L1A.2@30.685,78.55 C8A.1
  Top Layer w0.6: 30.3,75 30.3,76.1 ; DCDCA.12@30.535,75.515 L1A.2@30.535,78.5
NetC8A_2: C8A.2 DCDCA.14 | length 4.2
  Top Layer w0.254: DCDCA.14@29.4,75.575 v1(29.4,76.9) ; 31.75,77.05 C8A.2
  Bottom Layer w0.254: v1@29.5,76.8 v1(31.5,76.8)
NetC8B_1: C8B.1 DCDCB.12 DCDCB.13 L1B.2 | length 5.3
  Top Layer w0.254: DCDCB.12@30.573,37.75 DCDCB.12 ; L1B.2@30.585,40.95 C8B.1
  Top Layer w0.8: 30.335,37.735 L1B.2
NetC8B_2: C8B.2 DCDCB.14 | length 5.3
  Top Layer w0.254: v1(29.2,39.2) 29.227,39.173 DCDCB.14@29.227,37.998 ; DCDCB.14@29.4,37.825 29.3,37.925 29.4,38.025 DCDCB.14@29.4,38.309 ; v1@31.75,39.45 C8B.2
  Bottom Layer w0.254: v1(29.2,39.2) 29.598,39.2 29.698,39.3 v1(31.6,39.3)
NetC9A_2: C9A.2 DCDCA.18 DCDCA.19 | length 7.5
  Top Layer w0.254: C9A.2 23.3,78.5 25,76.8 25.85,76.8 ; DCDCA.19 26.075,76.575 25.85,76.8 ; DCDCA.18 26.725,76.475 26.4,76.8 25.85,76.8
NetC9B_2: C9B.2 DCDCB.18 DCDCB.19 | length 7.3
  Top Layer w0.254: C9B.2 23.45,41.05 25.5,39 25.9,39 26.075,38.825 ; DCDCB.19 26.075,38.825 ; DCDCB.18 26.725,38.575 26.5,38.8 26.1,38.8 26.075,38.825
NetC10A_1: C10A.1 C11A.2 DCDCA.2 | length 21.1
  Top Layer w0.254: v1(25.2,67.9) 25.5,67.9 26.075,68.475 ; DCDCA.2 26.075,68.525 26.6,68 26.65,68 27.188,67.462 27.398,67.462 28.25,66.61 C11A.2 ; v1(32.4,74) C10A.1
  Bottom Layer w0.254: v1(25.2,67.9) 25.2,66.8 26.5,65.5 27.558,65.5 32.4,70.342 v1(32.4,74)
NetC10A_2: C10A.2 R6A.2 | length 4.8
  Top Layer w0.254: C10A.2 35.4,72.5 36.15,73.25 R6A.2@38.15,73.25
NetC10B_1: C10B.1 C11B.2 DCDCB.2 | length 25.1
  Top Layer w0.254: v1(25.6,30.2) 26.012,30.612 26.075,30.612 ; DCDCB.2 26.075,30.612 ; C11B.2 28.25,28.437 26.075,30.612 ; v1(32.4,35.4) 32.4,36.7 32.8,37.1 33.3,37.1 33.65,36.75 C10B.1
  Bottom Layer w0.254: v1(25.6,30.2) 25.6,28 26.6,27 28.6,27 31.773,30.173 31.773,30.627 32.4,31.254 v1(32.4,35.4)
NetC10B_2: C10B.2 R6B.2 | length 4.9
  Top Layer w0.254: C10B.2 35.45,34.75 36.3,35.6 R6B.2
NetC11A_1: C11A.1 DCDCA.3 R6A.1 R8A.2 R9A.1 R10A.1 | length 29.5
  Top Layer w0.254: DCDCA.3 26.725,68.717 27.426,68.016 27.526,68.016 28.12,67.423 29.5,67.423 29.5,67.4 29.75,67.15 C11A.1 v1(29.75,65.45) ; v1(37.4,70.5) 38.8,70.5 38.9,70.6 38.9,71.2 39.65,71.95 R6A.1@39.65,73.25 ; R6A.1 40.5,73.6 44.5,73.6 44.9,74 R9A.1 R10A.1
  Bottom Layer w0.254: v1(29.75,65.45) 31.35,65.45 36.5,70.6 36.6,70.5 v1(37.4,70.5)
NetC11B_1: C11B.1 DCDCB.3 R6B.1 R8B.2 R9B.1 R10B.1 | length 32.8
  Top Layer w0.254: DCDCB.3 26.725,30.675 28.1,29.3 28.6,29.3 29.75,28.15 C11B.1 ; v1(29.7,25.8) C11B.1@29.7,27.15 ; v1(36.9,32.2) 37.35,32.65 R8B.2 38.9,33.8 39.65,34.55 R6B.1 44,35.6 44.9,36.5 R9B.1 R10B.1
  Bottom Layer w0.254: v1(29.7,25.8) 31.7,25.8 36.9,31 v1(36.9,32.2)
NetC12A_2: C12A.2 DCDCA.8 R7A.2 | length 15.9
  Top Layer w0.254: R7A.2 28.4,64.3 29.7,64.3 30.8,65.4 30.8,66.742 29.975,67.567 29.975,67.917 29.977,67.919 29.977,69.598 DCDCA.8 ; v1@30.812,66.8 v1(31.1,66.8) ; C12A.2 34.7,71 34.8,70.9 v1(34.8,70.3)
  Bottom Layer w0.254: v1(31.1,66.8) 31.2,66.8 34.7,70.3 v1(34.8,70.3)
NetC12B_2: C12B.2 DCDCB.8 R7B.2 | length 17.6
  Top Layer w0.254: R7B.2 30.6,25.1 30.9,25.4 30.9,27.6 30.6,27.9 ; DCDCB.8 29.975,30.482 30.3,30.157 30.3,28.242 30.6,27.942 30.6,27.9 ; v1(31.1,28.5) 30.6,28 30.6,27.9 ; v1(32.7,30.2) 32.7,32.1 32.4,32.4 32.65,32.65 C12B.2
  Bottom Layer w0.254: v1(31.1,28.5) 32.7,30.1 v1(32.7,30.2)
NetC13A_1: C13A.1 C14A.1 C15A.2 C16A.1 DCDCA.9 LIM2A.1 LIM2A.3 POT2A.1 R11A.2 | length 105.8
  Top Layer w0.254: v1(20.6,63.4) 21.7,62.3 31.1,62.3 32.45,63.65 ; DCDCA.9 DCDCA.9@30.625,70.225 ; 46.6,75.075 48.988,75.075 49.463,75.55 LIM2A.3 ; 46.8,73 R11A.2 ; C16A.1@47.775,77.625 47.775,78.625 48.9,79.75 75.15,79.75 77.92,82.52 POT2A.1
  Top Layer w0.4: v1(20.6,68.1) 20.6,70 21.8,71.2 C15A.2 C13A.1 ; 30.625,68.275 DCDCA.9
  Top Layer w0.6: 30.625,68.275 30.9,68
  Top Layer w0.8: 49.025,77.5 LIM2A.1@50.4,77.5
  Top Layer w1: 30.9,68 31.9,68 32.45,67.45 C14A.1 32.45,63.65 35.15,63.65 36.8,65.3 36.8,67.8 36.2,68.4 36.2,71.7 36.6,72.1 v2(38.2,72.1) ; v2(40.9,72.1) 45.5,72.1 46.6,73.2 46.6,75.075 46.6,76.95 ; 46.65,77 47.15,77.5 49.025,77.5
  Bottom Layer w0.4: v1(20.6,63.4) v1(20.6,68.1)
  Bottom Layer w1: v2(38.2,72.1) v2(40.9,72.1)
NetC13A_2: C13A.2 R9A.2 | length 20.9
  Top Layer w0.254: C13A.2 v1(24.4,75) ; v1(37.4,74.8) 43.35,74.8 R9A.2
  Bottom Layer w0.254: v1@24.5,74.8 v1(37.4,74.8)
NetC13B_1: C13B.1 C14B.1 C15B.2 C16B.1 DCDCB.9 LIM2B.1 LIM2B.3 POT2B.1 R11B.2 | length 101.9
  Top Layer w0.254: v1(20.7,24.3) 31.4,24.3 32.4,25.3 32.4,27.05 C14B.1@32.45,27.1 ; v1(20.7,30) 20.7,33.3 21.3,33.9 C15B.2 C13B.1 ; 46.4,34.7 R11B.2 ; C16B.1 47.65,41.45 49.146,42.946 74.546,42.946 77.42,45.82 POT2B.1 ; 48.65,39.95 48.65,38.95 49.15,38.45 LIM2B.3
  Top Layer w0.4: DCDCB.9 30.625,30.875 30.9,30.6
  Top Layer w0.5: 30.9,30.6 30.9,30.1 32.45,28.55
  Top Layer w0.8: C16B.1 48.65,39.95 49.05,40.35 LIM2B.1
  Top Layer w1: C14B.1@32.45,27.1 32.45,28.55 ; 32.5,28.5 40.2,28.5 46.4,34.7 46.4,39.6 46.75,39.95 C16B.1
  Bottom Layer w0.254: v1(20.7,24.3) 20.7,29.8 20.8,29.9 v1(20.7,30)
NetC13B_2: C13B.2 R9B.2 | length 21.3
  Top Layer w0.254: C13B.2 22.45,37.4 v1(24.3,37.4) ; v1(36.973,37.373) R9B.2@43.273,37.373
  Bottom Layer w0.254: v1(24.3,37.4) 24.154,37.4 24.127,37.373 v1(36.973,37.373)
NetC19A_2: C19A.2 R13A.2 R14A.1 U3A.6 | length 13.4
  Top Layer w0.254: C19A.2 62.4,74.75 62.825,75.175 U3A.6 71.575,75.175 ; 71.65,74.5 R13A.2
NetC19B_2: C19B.2 R13B.2 R14B.1 U3B.6 | length 15
  Top Layer w0.2: C19B.2 62.25,37.523 62.902,38.175 U3B.6
  Top Layer w0.254: U3B.6 71.575,38.175 ; R14B.1 R13B.2
NetLIM1A_5: LIM1A.5 POT1A.1 | length 32.3
  Top Layer w0.2: LIM1A.5 54.9,89 55.4,89.5 55.4,93 78.71,93 POT1A.1
NetLIM1A_6: LIM1A.6 R3A.2 U2A.3 | length 11.7
  Top Layer w0.254: 58.15,87.75 58.15,88.25 58.325,88.425 U2A.3
  Top Layer w0.8: LIM1A.6 v2(54.35,89.95) ; R3A.2 57.65,86.25 58.15,86.75 58.15,87.75 v2(57.4,87.75)
  Bottom Layer w0.8: v2(54.35,89.95) 56.2,89.95 57.4,88.75 v2(57.4,87.75)
NetLIM1B_5: LIM1B.5 POT1B.1 | length 32.7
  Top Layer w0.254: LIM1B.5 54.8,50 55.4,50.6 55.4,53.7 56.5,54.8 69.7,54.8 70.8,55.9 79.11,55.9 POT1B.1
NetLIM1B_6: LIM1B.6 R3B.2 U2B.3 | length 10.4
  Top Layer w0.2: v2@57.9,49.4 58.5,50 U2B.3@59.47,50
  Top Layer w1: LIM1B.6@52.6,51.05 54.35,51.05 v2(54.4,51) ; R3B.2 57.464,47.6 57.9,48.036 v2(57.9,49.3) v2@57.9,49.4
  Bottom Layer w1: v2@54.6,51 56.2,51 v2(57.9,49.3)
NetLIM2A_5: LIM2A.5 POT3A.1 | length 32.1
  Top Layer w0.254: LIM2A.5 55,76.5 55.5,77 55.5,78.85 55.9,79.25 74.96,79.25 POT3A.1
NetLIM2A_6: LIM2A.6 R12A.2 U3A.3 | length 11.7
  Top Layer w0.254: 57.65,74.5 58.325,75.175 U3A.3
  Top Layer w0.8: LIM2A.6@52.9,77.5 v2(54.5,77.5)
  Top Layer w1: R12A.2 57.15,73 57.65,73.5 57.65,74.5 57.55,74.6 v2(56.9,74.6)
  Bottom Layer w1: v2(54.5,77.5) 55.4,77.5 55.65,77.25 55.65,76 56,75.65 56.4,75.65 56.9,75.15 v2(56.9,74.6)
NetLIM2B_5: LIM2B.5 POT3B.1 | length 32.3
  Top Layer w0.254: LIM2B.5 55.4,39.4 55.762,39.762 55.762,40.798 55.727,40.833 55.727,42.027 56.192,42.492 75.018,42.492 POT3B.1
NetLIM2B_6: LIM2B.6 R12B.2 U3B.3 | length 12.5
  Top Layer w0.254: v2@57.875,37.4 57.875,37.775 58.275,38.175 U3B.3
  Top Layer w0.8: LIM2B.6@53,40.4 v2(54.8,40.4)
  Top Layer w1: R12B.2 57.175,35 57.875,35.7 57.875,37.4 v2(57.3,37.4)
  Bottom Layer w1: v2(54.8,40.4) 54.8,39.1 56.5,37.4 v2(57.3,37.4)
NetPOT2A_3: POT2A.3 R10A.2 | length 35.1
  Top Layer w0.254: R10A.2 43.4,79.25 44.4,80.25 61.4,80.25 63.67,82.52 POT2A.3
NetPOT2B_3: POT2B.3 R10B.2 | length 35.8
  Top Layer w0.254: R10B.2 43.4,42.6 44.2,43.4 63.6,43.4 66.02,45.82 POT2B.3
NetR1A_2: R1A.2 SW1A.6 | length 4.1
  Top Layer w0.254: R1A.2 37.65,88.75 38.15,88.25 SW1A.6@40.5,88.25
NetR1B_2: R1B.2 SW1B.6 | length 4.2
  Top Layer w0.2: R1B.2 37.85,49.45 38.15,49.15 SW1B.6
OUTA_3.3V: C3A.1 OUTA_3.3V.1 R3A.1 U1A.7 U2A.2 | length 72.4
  Top Layer w0.2: 57.9,89.5 58.325,89.075 U2A.2
  Top Layer w0.254: U1A.7 30.71,85.19 30.9,85 43.9,85 44.65,85.75 v1(45.65,85.75) ; v1(48.9,85.75) 53.9,85.75 54.4,86.25 R3A.1
  Top Layer w1: R3A.1 55.15,87 55.875,87.725 55.875,88.725 C3A.1 57.9,89.5 58.1,89.7 v2(58.1,91.2) ; v2(60.4,95) 82.613,95 OUTA_3.3V.1
  Bottom Layer w0.254: v1(45.65,85.75) v1(48.9,85.75)
  Bottom Layer w1: v2(58.1,91.2) 58.1,93.8 57.9,94 58.9,95 v2(60.4,95)
OUTA_REGV: C17A.1 J1A.5 OUTA_REGV.1 R12A.1 U1A.12 U3A.2 | length 225.2
  Top Layer w0.254: J1A.5 14.275,12.975 15.6,14.3 24.5,14.3 v1(24.6,14.2) ; v1(25,93.5) 25.4,93.5 25.63,93.27 U1A.12 ; 57.65,76.5 58.325,75.825 U3A.2 ; v1(82.5,61.2) 84.1,61.2 89.378,66.478 OUTA_REGV.1
  Top Layer w1: R12A.1 54.9,75 C17A.1 57.65,76.5 57.65,76.95 v2(58.807,78.107) ; v2(60.4,81.25) 61.15,81.25 65.4,85.5 82.15,85.5 83.15,84.5 83.15,81.636 OUTA_REGV.1
  Bottom Layer w0.254: v1(24.6,14.2) 24.7,14.1 65.8,14.1 82.5,30.8 v1(82.5,61.2) ; v1(25,93.5) 25,89.1 26.6,87.5 27.8,87.5 29.003,86.297 29.003,81.897 30.337,80.563 58.563,80.563
  Bottom Layer w1: v2(58.807,78.107) 58.807,80.807 59.25,81.25 v2(60.4,81.25)
OUTB_3.3V: C3B.1 OUTB_3.3V.1 R3B.1 U1B.7 U2B.2 | length 72.6
  Top Layer w0.2: U1B.7 30.71,46.09 31.6,45.2 43.6,45.2 v1(45.3,46.9) ; v1(48.9,46.9) 54.45,46.9 R3B.1
  Top Layer w0.254: C3B.1 C3B.1@56.7,50.8 ; 58.1,50.8 59.469,50.8 U2B.2
  Top Layer w1: R3B.1 55.15,48.45 56.65,49.95 C3B.1 ; C3B.1@56.7,50.8 58.1,50.8 v2(58.1,52.4) ; v2(62.1,56.2) 63.5,56.2 65.3,58 83.628,58 OUTB_3.3V.1
  Bottom Layer w0.2: v1(45.3,46.9) v1(48.9,46.9)
  Bottom Layer w1: v2(58.1,52.4) 58.1,54.3 60,56.2 v2(62.1,56.2)
OUTB_REGV: C17B.1 J1B.5 OUTB_REGV.1 R12B.1 U1B.12 U3B.2 | length 131.2
  Top Layer w0.254: v1(25.1,55.327) 25.26,55.327 25.627,54.96 25.627,52.903 U1B.12 ; J1B.5 31.775,12.375 53.85,34.45 54.4,34.45 R12B.1 ; 57.25,39.25 57.425,39.425 58,38.85 59.519,38.85 U3B.2 ; OUTB_REGV.1@88.65,39.75 OUTB_REGV.1
  Top Layer w1: R12B.1 54.95,35.85 55.8,36.7 55.8,37.9 56.4,38.5 56.4,39.23 56.42,39.25 57.25,39.25 ; 57.425,39.425 58.9,40.9 v2(58.9,41.5) ; v2(60.9,44.4) 62.6,44.4 65.7,47.5 80.9,47.5 OUTB_REGV.1@88.65,39.75
  Bottom Layer w0.254: v1(25.1,55.327) 25.1,50.6 26.5,49.2 34.7,49.2 35.9,48 35.9,44 36.8,43.1 58.9,43.1
  Bottom Layer w1: v2(58.9,41.5) 58.9,43.9 59.4,44.4 v2(60.9,44.4)
RA2A: U1A.11
RA2B: U1B.11
RA3A: J1A.1 U1A.4 | length 86
  Top Layer w0.254: J1A.1 9.275,55.375 v1(17.9,64) ; v1(26.9,84.7) U1A.4
  Bottom Layer w0.254: v1(17.9,64) 17.9,76.3 23.5,81.9 23.5,83.8 24.4,84.7 v1@26.8,84.7
RA3B: J1B.1 U1B.4 | length 62.8
  Top Layer w0.5: v1(11.6,45.5) 11.6,24.4 16.2,19.8 20.8,19.8 26.775,13.825 J1B.1 ; v1(26.9,45.5) U1B.4
  Bottom Layer w0.5: v1(11.6,45.5) v1(26.9,45.5)
SCL: I2C.1 U1A.10 U1B.10 | length 217
  Top Layer w0.2: U1B.10 28.1,52.97 28.1,58.6 29,59.5 35.9,59.5 40.9,64.5 81.4,64.5 v1(82.2,63.7) ; U1A.10 28.17,93.87 v1(30.3,96) ; I2C.1 v1(61.575,12.875)
  Bottom Layer w0.2: v1(30.3,96) 79.2,96 79.95,95.25 79.95,94.25 82.2,92 v1(82.2,63.7) 82.2,63.2 83.3,62.1 83.3,30.2 65.975,12.875 v1(61.575,12.875)
SDA: I2C.2 U1A.9 U1B.9 | length 212.8
  Top Layer w0.2: U1B.9 29.44,56.94 30.3,57.8 37.2,57.8 42.3,62.9 v1(83.9,62.9) ; U1A.9 29.44,93.44 30.7,94.7 40.5,94.7 41.7,93.5 v1(81.9,93.5) ; I2C.2 v1(62.825,11.675)
  Bottom Layer w0.2: v1(62.825,11.675) 66.375,11.675 83.9,29.2 v1(83.9,62.9) 83.2,63.6 83.2,93 82.7,93.5 v1(81.9,93.5)
pads on no net: J1A.6 J1B.6

## Polygon pours and split planes (outlines as drawn)
GND on Top Layer "Top Layer-No Net" (solid, pour order 6): 97.2,97.2 0.2,97.2 0.2,0.2 97.2,0.2
GND on Bottom Layer "Top Layer-No Net" (solid, pour order 4): 0.2,97.2 97.2,97.2 97.2,0.2 0.2,0.2

## Keep-outs
Keep-Out Layer:
  lines w0.3: 0,0 97.4,0 97.4,97.4 0,97.4 0,0

## Silkscreen, mask and mechanical layers (free items; w line width, h text height)
Top Overlay:
  text "UPCNSL_EPS_POL_v.2" at 95,2.8 h1.52 r90